# Altium PCB PCB_DO_AN_1_ver1.PcbDoc
Units mm, origin at the board's own origin, x right, y up, seen from the top; angles counter-clockwise.
Board outline 75.06 x 48.26 mm, 2 copper layers (Top Layer, Bottom Layer); 55 components, 40 nets, 213 pads, 53 vias.
Unrouted connection lines stored in the file: 1.
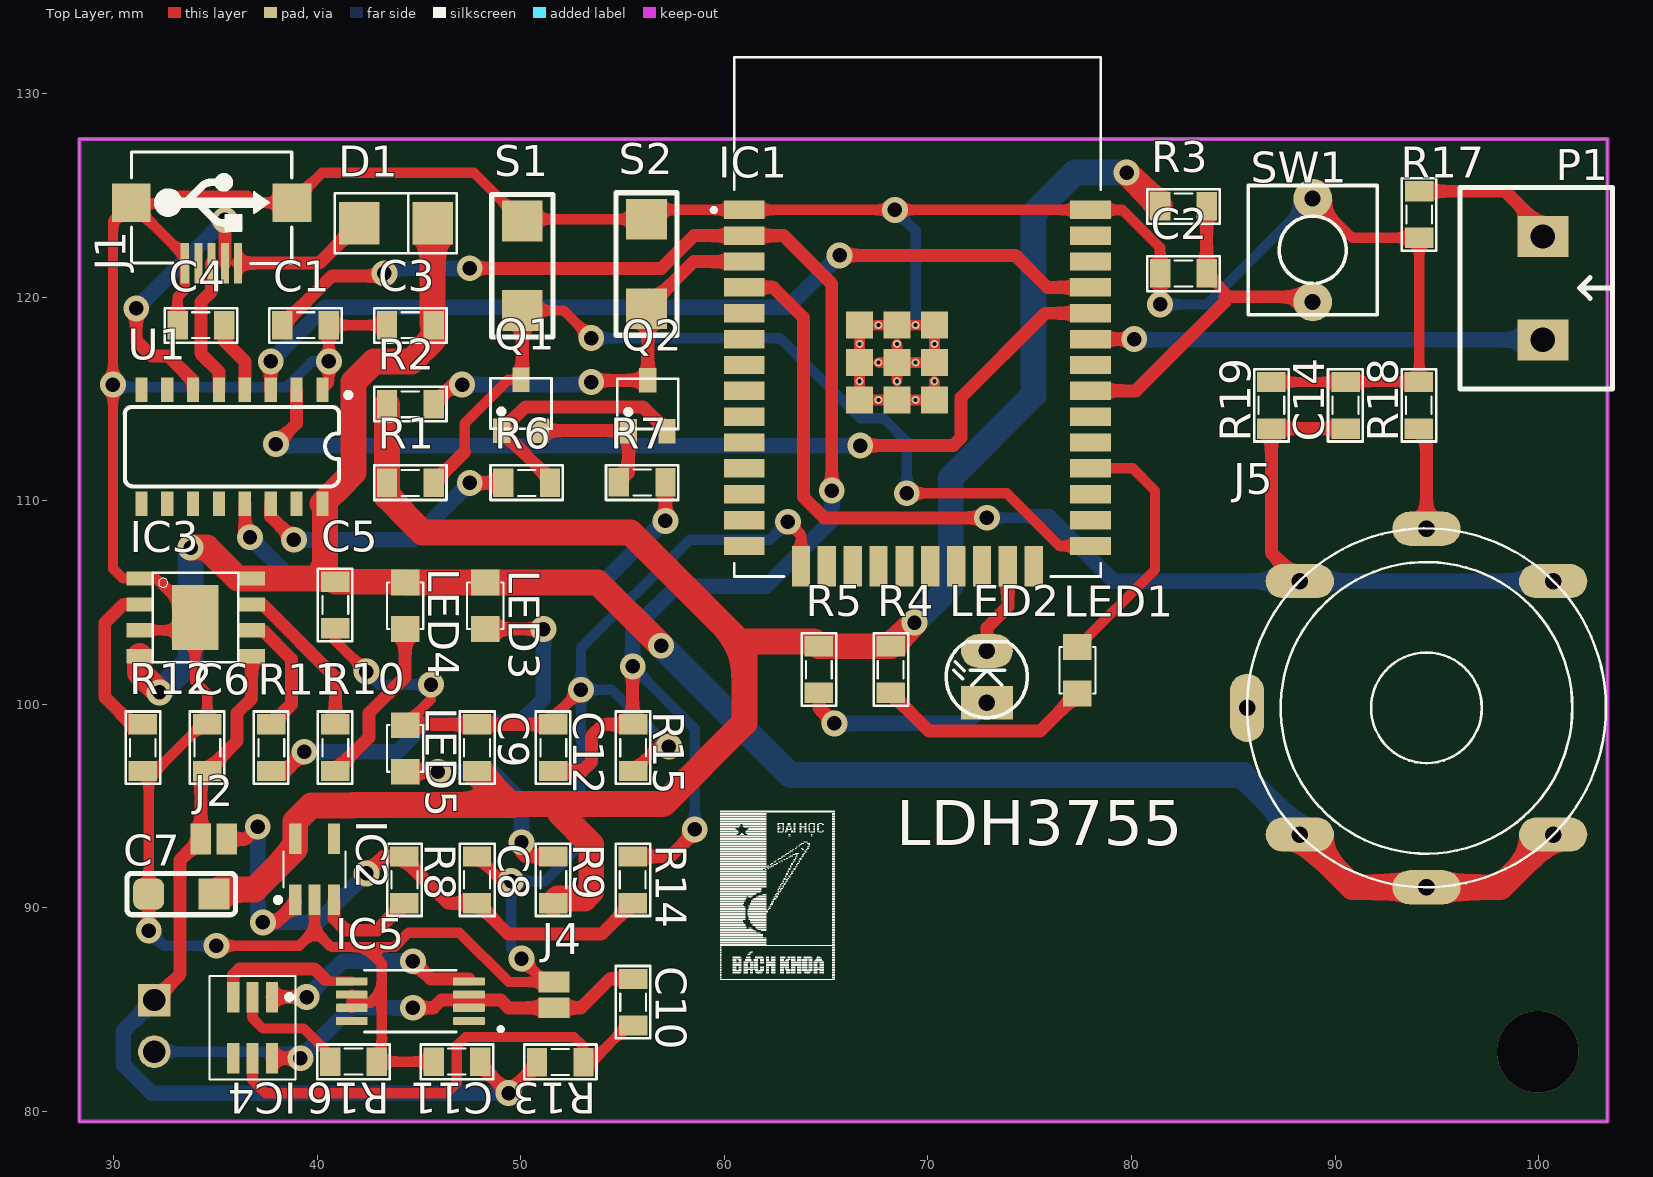
[diagram p0: Top Layer view]
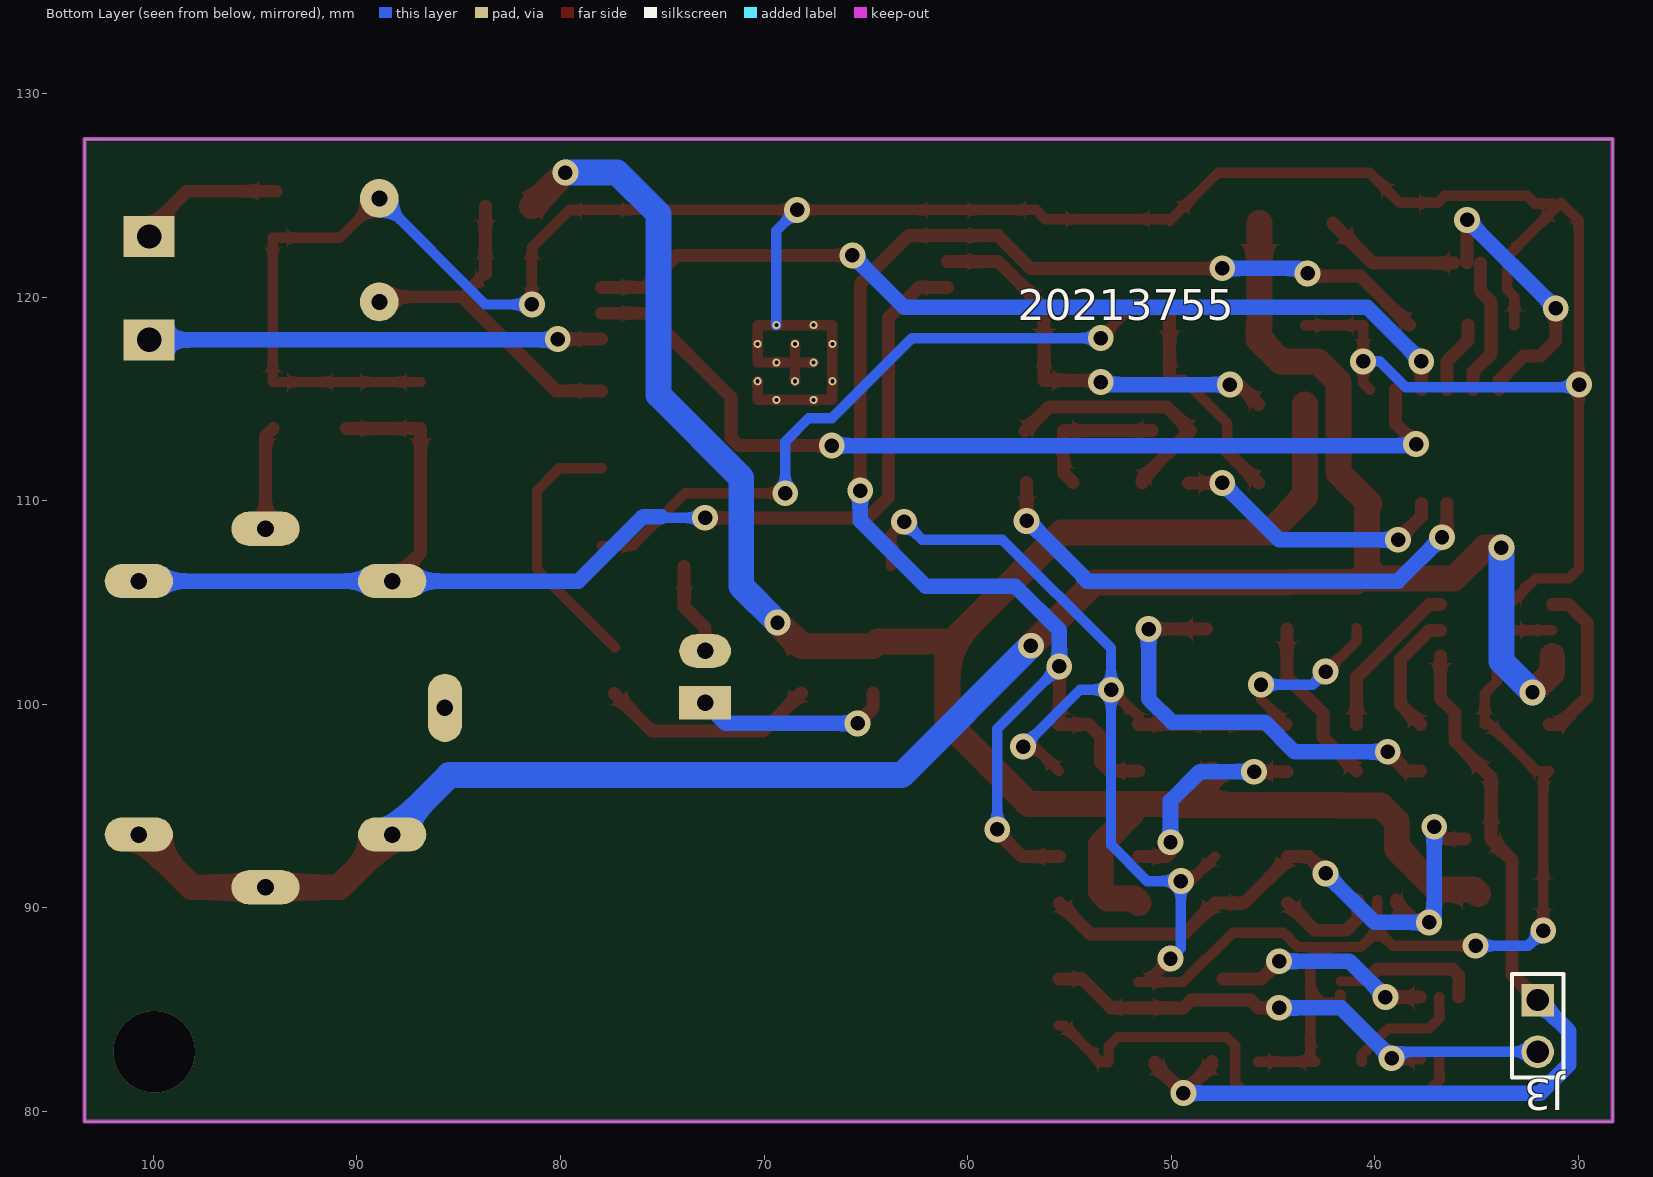
[diagram p1: Bottom Layer view, seen from below]
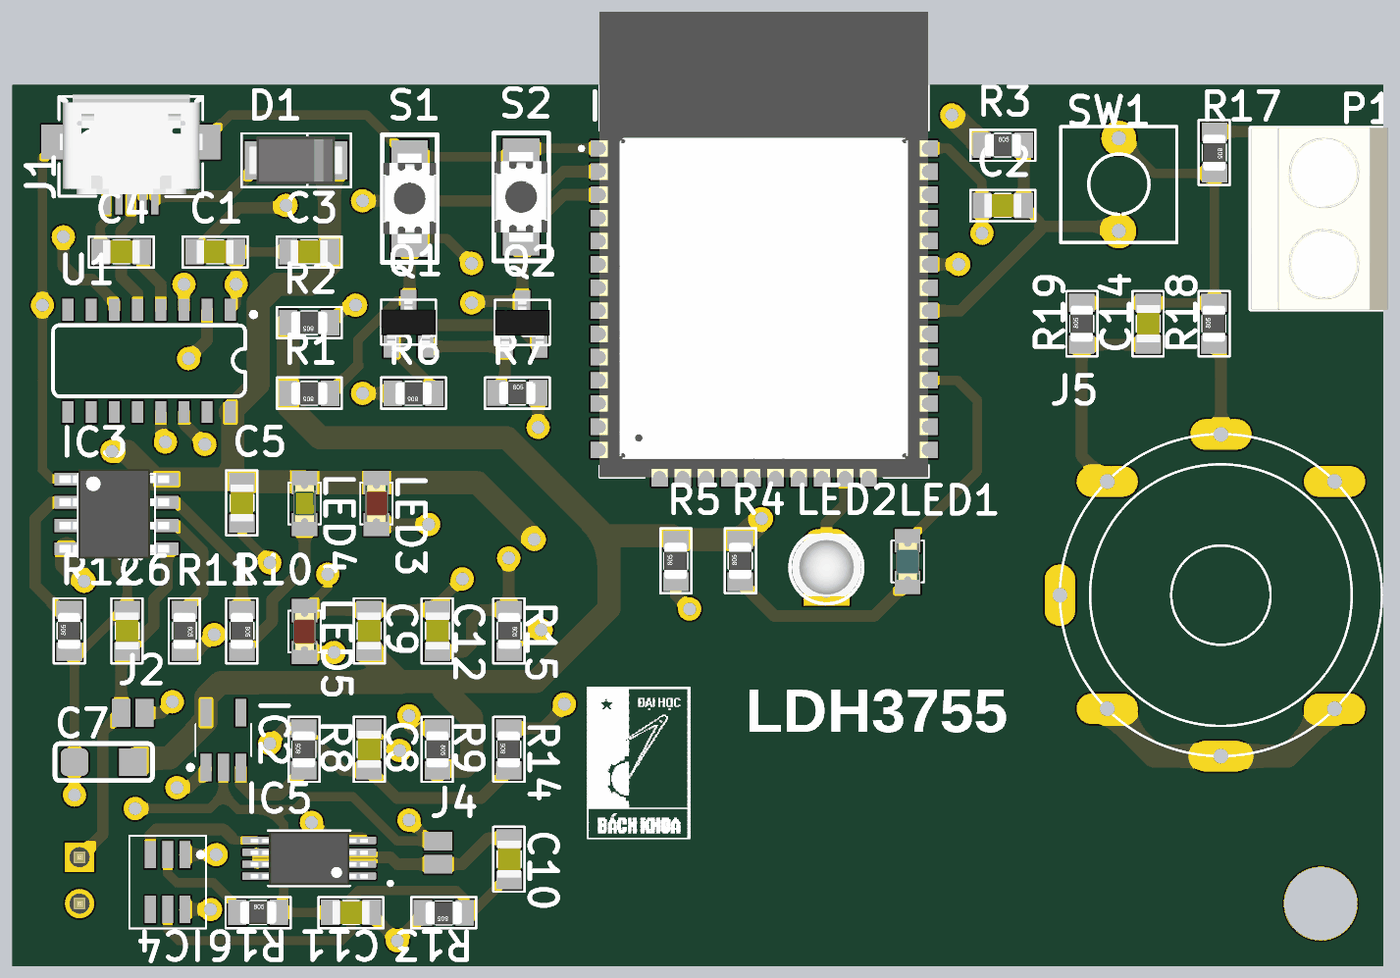
[diagram p2: 3D render of the assembled board from above, using the file's embedded part models]

## Layer stack, top to bottom
Top Solder: solder mask 0.0102, Solder Resist, Dk 3.5
Top Layer: signal copper 0.0356
Dielectric 1: dielectric 0.32, FR-4, Dk 4.8
Bottom Layer: signal copper 0.0356
Bottom Solder: solder mask 0.0102, Solder Resist, Dk 3.5

## Board outline
28.321,79.502 103.378,79.502 103.378,127.762 28.321,127.762

## Design rules (kind name [scope] priority, off if disabled: settings)
Clearance Clearance_1 [All] p1: gap=0.254 ignorepadtopadclearanceinfootprint=FALSE except(0: Arc-Hole Track-Hole SMDPad-Hole THPad-Hole Via-Hole Fill-Hole Poly-Hole Region-Hole Text-Hole)
Clearance [All] p2: gap=0.254 ignorepadtopadclearanceinfootprint=FALSE except(0: Arc-Hole Track-Hole SMDPad-Hole THPad-Hole Via-Hole Fill-Hole Poly-Hole Region-Hole Text-Hole)
PolygonConnect [All] p1: connectstyle=Relief reliefconductorwidth=0.254 reliefentries=4 polygonreliefangle="90 Angle" airgapwidth=0.254
RoutingVias [All] p1: holewidth=1.27 width=1.27 viastyle="Through Hole" minholewidth=0.254 minwidth=1.27 maxholewidth=0.762 maxwidth=1.27
SolderMaskExpansion [All] p1: expansion=0.102
Width [All] p1: maxlimit=1.27 minlimit=0.508 preferedwidth=0.762 toplayer_prefwidth=0.635 minimp=50.000000 maximp=50.000000 favimp=50.000000
30 further rules are at their usual default settings.

## Classes and differential pairs
component class U_Sensor: C14 J5 P1 R17 R18 R19
component class U_POWER: C5 C6 C7 C8 C9 C10 C11 C12 IC2 IC3 IC4 IC5 J2 J3 J4 LED3 LED4 LED5 R8 R9 R10 R11 R12 R13 R14 R15 R16
component class U_MCU: C1 C2 C3 C4 D1 IC1 J1 LED1 LED2 Q1 Q2 R1 R2 R3 R4 R5 R6 R7 S1 S2 SW1 U1

## Components (designator, comment, footprint, x,y, rotation, side; value= is the part's Value field where it differs from the comment)
C1 "104" CAP_0805 39.433,118.618 r0 top value=33p
C2 "10uF" CAP_0805 82.55,121.158 r0 top value=33p
C3 "10uF" CAP_0805 44.577,118.618 r0 top value=33p
C4 "100nF" CAP_0805 34.29,118.618 r0 top value=33p
C5 "100nF" CAP_0805 40.894,104.875 r270 top value=33p
C6 "100nF" CAP_0805 34.606,97.866 r270 top value=33p
C7 "220uF" CAP_TANTALUM_3216 33.328,90.678 r180 top
C8 "470nF" CAP_0805 47.854,91.376 r90 top value=33p
C9 "100nF" CAP_0805 47.854,97.866 r90 top value=33p
C10 "100nF" CAP_0805 55.524,85.363 r270 top value=33p
C11 "100nF" CAP_0805 46.863,82.448 r0 top value=33p
C12 "100nF" CAP_0805 51.6,97.866 r270 top value=33p
C14 "104" CAP_0805 90.513,114.681 r270 top value=33p
D1 "Diode SMD" DIO-214AC(SMA) 43.942,123.579 r180 top value=1N5007
IC1 "ESP32-WROOM-32" MODULE_ESP32-WROOM-32 69.481,119.023 r0 top
IC2 "RT9013" SOT23-5 39.878,91.887 r90 top
IC3 "TP4056" TP4056 34.036,104.267 r0 top
IC4 "DW01A" SOT23-6 36.83,84.112 r270 top
IC5 "FS8205A" FS8205A 44.577,85.471 r180 top
J1 "USB-5" USB-M1 34.817,121.666 r0 top
J2 "Jumper2" JUMPER2 35.56,93.375 r0 top
J3 "VBAT_IN" JP2-D1T 32.004,85.471 r270 bottom
J4 "Jumper2" JUMPER2 51.638,86.36 r90 top
J5 "Gas Sensor Socket" MQ2 94.488,99.822 r180 top
LED1 "LED" LED-0805-Blue 77.343,100.52 r90 top value="LED 3 ly Single Colour"
LED2 "LED" LED-3 72.898,100.076 r90 top value="LED 3 ly Single Colour"
LED3 "LED" LED-0805-Red 48.26,105.98 r270 top value="LED 3 ly Single Colour"
LED4 "LED" LED-0805-Green 44.323,105.98 r270 top value="LED 3 ly Single Colour"
LED5 "" LED-0805-Red 44.323,96.685 r90 top value="LED 3 ly Single Colour"
P1 "Header 2 - M" "Medium - Header 2" 100.203,120.434 r270 top
Q1 "2SC1815" SOT23D 50.013,114.681 r0 top value=C1815
Q2 "2SC1815" SOT23D 56.246,114.661 r0 top value=C1815
R1 "10k" RES-SMD-0805 44.577,110.871 r180 top
R2 "10k" RES-SMD-0805 44.577,114.732 r180 top
R3 "10k" RES-SMD-0805 82.55,124.46 r0 top
R4 "Resistor - SMD" RES-SMD-0805 68.172,101.702 r90 top
R5 "Resistor - SMD" RES-SMD-0805 64.643,101.702 r90 top
R6 "10k" RES-SMD-0805 50.292,110.871 r180 top
R7 "10k" RES-SMD-0805 55.966,110.896 r0 top
R8 "10k" RES-SMD-0805 44.285,91.376 r90 top
R9 "1k" RES-SMD-0805 51.6,91.376 r270 top
R10 "1k" RES-SMD-0805 40.894,97.866 r270 top
R11 "1k" RES-SMD-0805 37.75,97.866 r270 top
R12 "1k2" RES-SMD-0805 31.436,97.866 r90 top
R13 "0.1k" RES-SMD-0805 51.943,82.423 r180 top
R14 "30k" RES-SMD-0805 55.499,91.376 r90 top
R15 "100k" RES-SMD-0805 55.524,97.866 r270 top
R16 "1k" RES-SMD-0805 41.783,82.448 r0 top
R17 "Resistor - SMD" RES-SMD-0805 94.132,124.054 r270 top
R18 "Resistor - SMD" RES-SMD-0805 94.107,114.681 r90 top
R19 "Resistor - SMD" RES-SMD-0805 86.868,114.681 r90 top
S1 "SW-SMD" "SW 3x2x4" 50.077,121.539 r90 top
S2 "SW-SMD" "SW 3x2x4" 56.181,121.625 r90 top
SW1 "SW" SW2 88.9,124.841 r270 top value="SW chip 2 pin"
U1 "CH340C" SOP-16 35.814,112.649 r180 top

## Footprints (in the part's own frame and the unit in brackets; to place one, negate y for a bottom-side part, rotate by r counter-clockwise, add the part's x,y. Pads: shape width x height; smd on the part's side, far side on the other; paste and mask are expansions set on the pad)
CAP_0805 [mil]
  rect 39.37x55 smd: 1(-45,0) 2(45,0)
  silkscreen extent -70,-34 70,33, body extent -40,-25 40,25, height 24
CAP_TANTALUM_3216 [mil]
  rect 60x60 smd: 1(-62.99,0)
  rrect50% 60x60 smd: 2(62.99,0)
  silkscreen extent -105,-40 105,40, body extent -67,-35 67,35, height 67
DIO-214AC(SMA) [mm] "DO-214AC Diode Smallest Size"
  rect 2x2.1 smd: 1(1.88,-0.051) 2(-1.732,-0.051)
  silkscreen extent -2.92,-1.52 3.07,1.42, body extent -2.5,-1.35 2.7,1.25, height 2.4
FS8205A [mm]
  rrect25% 1.56x0.4 smd: 1(-2.88,1.031) 2(-2.88,0.381) 3(-2.88,-0.269) 4(-2.88,-0.919) 5(2.88,-0.919) 6(2.88,-0.269) 7(2.88,0.381) 8(2.88,1.031)
  silkscreen extent -4.54,-1.46 2.25,1.57, body extent -3.2,-1.4 3.2,1.53, height 1.2
JP2-D1T [mm] "2 pins, 1 row, straight, gold plating"
  rect 1.6x1.6 hole 1.1: 1(0,0)
  round 1.6 hole 1.1: 2(2.54,0)
  silkscreen extent -1.27,-1.27 3.81,1.27, body extent -1.27,-1.27 3.81,1.27, height 8.54
JUMPER2 [mil]
  rect 40x60 smd: 1(-50,0) 2(0,0)
LED-3 [mil] "LED 2 PIN, 3ly Only colour"
  rect 65x100 hole 32: 1(0,0)
  oval 65x100 hole 32: 2(100,0)
  silkscreen extent -29,-78 118,79, body extent -13,-75 125,75, height 217
LED-0805-Blue [mil]
  rect 50x55 smd: 1(0,0) 2(90,0)
  silkscreen extent 0,-35 90,35, body extent 5,-25 85,25, height 43
LED-0805-Green [mil]
  rect 50x55 smd: 1(0,0) 2(90,0)
  silkscreen extent 0,-35 90,35, body extent 5,-25 85,25, height 43
LED-0805-Red [mil]
  rect 50x55 smd: 1(0,0) 2(90,0)
  silkscreen extent 0,-35 90,35, body extent 5,-25 85,25, height 43
"Medium - Header 2" [mm]
  rect 2x2.5 hole 1.2: 1(-2.54,0) 2(2.54,0)
  silkscreen extent -4.95,-4.08 4.95,3.43, body extent -5,-4.07 5,3.43, height 10
MODULE_ESP32-WROOM-32 [mm]
  rect 2x0.9 smd: 1(-8.5,5.26) 2(-8.5,3.99) 3(-8.5,2.72) 4(-8.5,1.45) 5(-8.5,0.18) 6(-8.5,-1.09) 7(-8.5,-2.36) 8(-8.5,-3.63) 9(-8.5,-4.9) 10(-8.5,-6.17) 11(-8.5,-7.44) 12(-8.5,-8.71) 13(-8.5,-9.98) 14(-8.5,-11.25) 25(8.5,-11.25) 26(8.5,-9.98) 27(8.5,-8.71) 28(8.5,-7.44) 29(8.5,-6.17) 30(8.5,-4.9) 31(8.5,-3.63) 32(8.5,-2.36) 33(8.5,-1.09) 34(8.5,0.18) 35(8.5,1.45) 36(8.5,2.72) 37(8.5,3.99) 38(8.5,5.26)
  rect 0.9x2 smd: 15(-5.715,-12.25) 16(-4.445,-12.25) 17(-3.175,-12.25) 18(-1.905,-12.25) 19(-0.635,-12.25) 20(0.635,-12.25) 21(1.905,-12.25) 22(3.175,-12.25) 23(4.445,-12.25) 24(5.715,-12.25)
  rect 1.33x1.33 smd: 39_1(-2.835,-0.405) 39_2(-1,-0.405) 39_3(0.835,-0.405) 39_4(-2.835,-2.24) 39_5(-1,-2.24) 39_6(0.835,-2.24) 39_7(-2.835,-4.075) 39_8(-1,-4.075) 39_9(0.835,-4.075)
  round 0.4 hole 0.2: 39_10(-1.917,-0.405) 39_11(-0.082,-0.405) 39_12(-2.835,-1.322) 39_13(-1,-1.322) 39_14(0.835,-1.322) 39_15(-1.917,-2.24) 39_16(-0.082,-2.24) 39_17(-2.835,-3.157) 39_18(-1,-3.157) 39_19(0.835,-3.157) 39_20(-1.917,-4.075) 39_21(-0.082,-4.075)
  silkscreen extent -10.1,-12.75 9,12.75, body extent -9.02,-12.75 8.98,12.75, height 3.2
MQ2 [mil] "6P-D17.6X9.8H"
  oval 132x66 hole 32: 1(-244.98,245) 2(0,347) 3(245,245) 4(245,-244.98) 5(0,-346.46) 6(-244.98,-244.98)
  oval 66x132 hole 32: 7(347,0)
  silkscreen extent -347,-347 347,347
RES-SMD-0805 [mil]
  rect 39.37x55 smd: 1(-45,0) 2(45,0)
  silkscreen extent -70,-34 70,33, body extent -39,-25 39,25, height 31
SOP-16 [mm]
  rect 0.6x1.2 smd: 1(-4.445,-2.8) 2(-3.175,-2.8) 3(-1.905,-2.8) 4(-0.635,-2.8) 5(0.635,-2.8) 6(1.905,-2.8) 7(3.175,-2.8) 8(4.445,-2.8) 9(4.445,2.8) 10(3.175,2.8) 11(1.905,2.8) 12(0.635,2.8) 13(-0.635,2.8) 14(-1.905,2.8) 15(-3.175,2.8) 16(-4.445,2.8)
  silkscreen extent -5.84,-2.67 5.26,1.95, body extent -4.95,-3.47 4.95,3.47, height 1.75
SOT23-5 [mm] "SOT23, 5-Leads, Body 3.0x3.0mm (max), Pitch 0.95mm, IPC Medium Density"
  rect 1.5x0.6 smd: 1(-1.5,0.95) 2(-1.5,0) 3(-1.5,-0.95) 4(1.5,-0.95) 5(1.5,0.95)
  silkscreen extent -1.62,-1.52 0.87,1.92, body extent -1.75,-1.52 1.75,1.53, height 1.45
SOT23-6 [mm] "SOT23, 5-Leads, Body 3.0x3.0mm (max), Pitch 0.95mm, IPC Medium Density"
  rect 1.5x0.6 smd: 1(-1.5,0.95) 2(-1.5,0) 3(-1.5,-0.95) 4(1.5,-0.95) 5(1.5,0) 6(1.5,0.95)
  silkscreen extent -2.54,-2.11 2.54,2.11, body extent -1.75,-1.52 1.75,1.53, height 1.45
SOT23D [mm] "SOT 23C - 1-3-2 - BCE"
  rect 0.85x1.2 smd: 1(-0.95,-1.25) 2(0.94,-1.245) 3(0,1.25)
  silkscreen extent -1.5,-1.14 1.5,1.32, body extent -1.5,-1.17 1.5,1.33, height 1.06
SW2 [mil] "SW button 2pin, 250x 250 mil"
  round 75 hole 31: 1(0,0) 2(200,0)
  silkscreen extent -25,-125 225,125
"SW 3x2x4" [mm]
  rect 2x2 smd: 1(-2.2,0) 2(2.2,0)
  silkscreen extent -3.5,-1.5 3.5,1.5, body extent -2.45,-1.45 2.45,1.45, height 2
TP4056 [mm]
  rect 1.3x0.7 smd: 1(-2.75,1.905) 2(-2.75,0.635) 3(-2.75,-0.635) 4(-2.75,-1.905) 5(2.75,-1.905) 6(2.75,-0.635) 7(2.75,0.635) 8(2.75,1.905)
  rect 2.3x3.2 smd: 3(-0.025,0)
  silkscreen extent -2.1,-2.2 2.1,2.2, body extent -3.13,-2.45 2.87,2.45, height 1.75
USB-M1 [mm]
  rect 0.4x2 smd: 1(1.3,0) 2(0.65,0) 3(0,0) 4(-0.65,0) 5(-1.321,0)
  rect 1.9x1.9 smd: 5(-3.95,2.968) 5(3.95,2.968)
  silkscreen extent -3.94,-0.03 3.94,5.46, body extent -3.98,0.11 4,5.54, height 2.71

## Part data
C1 C2 C3 C4 C5 C6 C8 C9 C10 C11 C12 C14: library part CapSMD, "Capacitor", LatestRevisionDate=17-Jul-2002, LatestRevisionNote="Re-released for DXP Platform.", PackageReference=RAD-0.3, Published=8-Jun-2000, Publisher="Altium Limited"
C7: library part "Cap Pol", "Polarized Capacitor (Axial)", LatestRevisionDate=17-Jul-2002, LatestRevisionNote="Re-released for DXP Platform.", PackageReference=POLAR0.8, Published=8-Jun-2000, Publisher="Altium Limited"
D1: "Default Diode", Code - JEDEC=DO-214-AB, Published=8-Jun-2000, Publisher="Altium Limited", Revision="July-2002: Re-released for DXP Platform."
IC1: "Bluetooth, WiFi Transceiver Module 2.4GHz ~ 2.5GHz Surface Mount", Package="Module Espressif Systems", Digi-Key_Part_Number=1904-1010-1-ND, Digi-Key_Purchase_URL=https://www.digikey.com/product-detail/en/espressif-systems/ESP32-WROOM-32/1904-1010-1-ND/8544305?utm_source=snapeda&utm_medium=aggregator&utm_campaign=symbol, MF="Espressif Systems", MP=ESP32-WROOM-32, SnapEDA_Link=https://www.snapeda.com/parts/ESP32-WROOM-32/Espressif%20Systems/view-part/2753322/?ref=snap
IC2: "https://linhkien.cxt.vn/5435-rt9013-33gb-ic-reg-linear-33v-500ma-sot23-5.html"
IC3: "Complete single cell Li-Ion battery with a constant current / constant voltage linear charger"
IC4: "One Cell Lithium-ion/Polymer Battery Protection IC"
J1: Manufacturer=FCI, Manufacturer Part Number=10118193-0001LF, Supplier Part Number 1=609-4616-1-ND, .Checked PCB=RF, .Checked SCH=MM, .Creator=MM, Category="Connectors, Interconnects", ComponentLink1Description=http://portal.fciconnect.com/Comergent//fci/drawing/10118193.pdf, ComponentLink1URL=http://portal.fciconnect.com/Comergent//fci/drawing/10118193.pdf, Connector Type="USB - micro B", Features="Shielded, Solder Retention", Gender=Receptacle, Ingress Protection=-, Mounting Type="Surface Mount, Right Angle, Horizontal", Number of Contacts=5, Packaging="Cut Tape (CT)", Pricing 1="1=0.46, 10=0.433, 25=0.3712, 50=0.3156, 100=0.3032, 250=0.27224, 500=0.25988 (USD)", RoHS="RoHS Compliant", Specifications="USB 2.0", Stock 1=28642, Supplier 1=Digi-Key
J2 J4: "Jumper, 2-Pin"
J3: library part JP2, "WR-PHD 2.54 mm Angled Socket Header", Manufacturer="Würth Elektronik eiSos GmbH", partNo=613002143121, ComponentLink1 Description=Manufacturer, ComponentLink1URL=http://www.we-online.com, ComponentLink2 Description=Datasheet, ComponentLink2URL=http://katalog.we-online.de/em/datasheet/6130xx143121.pdf, Created by="Karrer Zheng", Created Date="29 March 2013", NoPins=02
J5: library part MQ2
LED1 LED2 LED3 LED4: "LED Single colour Green and Red"
LED5: library part LED, "LED Single colour Green and Red"
P1: "Header, 2-Pin, Medium", LatestRevisionDate=17-Jul-2002, LatestRevisionNote="Re-released for DXP Platform.", Publisher="Altium Limited"
Q1 Q2: library part C1815, "NPN 600mW, ECB", =C2383
R1 R2 R3 R6 R7 R9 R13 R16: library part "Resistor - SMD", "Resistor SMD", Manufacturer="Generic Components", Class=Passive, Published=08/06/2000, Publisher="Altium Hobart Technology Centre"
R4 R5 R17 R18 R19: "Resistor SMD", Manufacturer="Generic Components", Class=Passive, Published=08/06/2000, Publisher="Altium Hobart Technology Centre"
R8 R10 R11 R12 R14 R15: library part "Resistor - SMD", "Resistor", Manufacturer="Generic Components", Class=Passive, Published=08/06/2000, Publisher="Altium Hobart Technology Centre"
S1 S2: "Switch", LatestRevisionDate=17-Jul-2002, LatestRevisionNote="Re-released for DXP Platform.", PackageReference=SPST-2, Published=24-Mar-1999, Publisher="Altium Limited"
SW1: library part SW2, "Switch button 2 pin"
U1: "USB to serial chip CH340", Package=Package, Availability=Unavailable, Check_prices=https://www.snapeda.com/parts/CH340C/WCH/view-part/5428851/?ref=eda, MF=WCH, MP=CH340C, Price=None, SnapEDA_Link=https://www.snapeda.com/parts/CH340C/WCH/view-part/5428851/?ref=snap

## Via types
v1: diameter 1.27, hole 0.711, Top Layer to Bottom Layer, 52 vias
v2: diameter 4, hole 4, Top Layer to Bottom Layer, 1 vias

## Nets (pads, with @x,y where several pads share a name; then routed paths per layer and width w, separated by ;. In a path a pad name is that pad's centre, name@x,y a point inside that pad or via, vN(x,y) a via of type N, cw(c..) or ccw(c..) an arc to the next point about the centre after c; other vN are vias at no path point)
3V3: C7.1 C9.1 IC2.5 R1.2 R2.2 R3.1 R4.2 R5.2 R9.2 | length 107.8
  Top Layer w1.27: C7.1 35.157,90.906 36.931,90.906 38.928,92.903 IC2.5 38.928,94.239 39.715,95.026 41.753,95.026 41.775,95.047 49.53,95.047 ; R2.2 R1.2 43.434,110.18 45.182,108.432 55.398,108.432 60.985,102.845 ; C9.1@48.031,96.545 49.53,95.047 ; R9.2 51.829,90.462 53.124,90.462 53.467,90.805 53.467,93.108 51.943,94.632 51.943,95.097 ; v1(69.341,104.013) R4.2 R5.2 64.415,103.073 60.985,103.073 60.985,102.845 ; v1(79.756,126.111) R3.1 ; 49.53,95.047 49.631,95.047 49.682,95.097 51.943,95.097 ; 51.943,95.097 56.997,95.097 60.985,99.085 60.985,102.845
  Bottom Layer w1.27: v1(69.341,104.013) 71.12,105.792 71.12,111.125 75.184,115.189 75.184,124.079 77.216,126.111 v1(79.756,126.111)
5V: C3.2 C5.1 D1.2 IC3.4 IC3.8 J5.1 J5.2 J5.3 LED3.1 LED4.1 U1.16 | length 105.4
  Top Layer w1.27: IC3.4 31.286,101.556 v1(32.258,100.584) ; v1(33.782,107.696) 34.589,107.696 36.113,106.172 IC3.8 40.741,106.172 C5.1 44.285,106.019 LED4.1 LED3.1 53.786,105.98 v1(56.896,102.87) ; 40.259,106.654 40.386,106.781 40.386,109.722 U1.16 41.783,111.373 41.783,115.824 42.799,116.84 44.632,116.84 45.72,117.927 C3.2 45.674,118.664 D1.2 ; J5.3 90.856,91.008 J5.2 98.12,91.008 J5.1
  Bottom Layer w1.27: v1(32.258,100.584) 33.782,102.108 v1(33.782,107.696) ; v1(56.896,102.87) 63.246,96.52 85.471,96.52 J5.3@88.392,93.599
GND: C1.2 C2.1 C3.1 C4.1 C5.2 C6.1 C7.2 C8.2 C9.2 C11.1 C12.1 C14.1 IC1.1 IC1.15 IC1.38 IC1.39_1 IC1.39_2 IC1.39_3 IC1.39_4 IC1.39_5 IC1.39_6 IC1.39_7 IC1.39_8 IC1.39_9 IC1.39_10 IC1.39_11 IC1.39_12 IC1.39_13 IC1.39_14 IC1.39_15 IC1.39_16 IC1.39_17 IC1.39_18 IC1.39_19 IC1.39_20 IC1.39_21 IC2.2 IC3.1 IC3.3 IC5.6 IC5.7 J1.5 J4.2 LED5.2 R12.1 R15.2 R16.2 R17.2 R18.2 R19.2 S1.2 S2.2 SW1.1 U1.1 | length 276.5
  Top Layer w0.508: J1.5@31.242,124.587 32.131,124.587 32.512,124.968 36.576,124.968 36.91,124.634 38.767,124.634 40.245,126.111 47.706,126.111 S1.2 50.163,123.825 S2.2 56.639,124.283 IC1.1 v1(68.376,124.283) IC1.38 79.552,124.283 81.407,122.428 C2.1 v1(81.407,119.634) ; IC3.3@31.286,103.632 33.376,103.632 IC3.3@34.011,104.267 ; v1(31.728,88.878) C7.2 31.728,96.431 R12.1 32.08,96.723 34.366,99.009 C6.1 34.606,100.522 34.011,101.117 IC3.3@34.011,104.267 ; C4.1 33.147,120.015 33.497,120.365 J1.5@33.497,121.666 ; J1.5@33.459,121.666 33.459,122.042 30.867,124.634 29.972,123.738 v1(29.972,115.697) 29.972,106.68 30.48,106.172 IC3.1 32.106,106.172 IC3.3@34.011,104.267 ; v1(35.052,88.138) 39.116,88.138 39.878,88.9 ; IC2.2 39.878,88.9 ; U1.1 40.576,115.766 v1(40.576,116.84) C1.2 C3.1 ; C5.2 40.894,103.124 v1(42.418,101.6) ; IC5.7 41.697,85.344 ; IC5.6 41.697,85.344 ; LED5.2 44.361,99.009 45.593,100.241 v1(45.593,100.965) ; C11.1 R16.2 43.18,82.702 43.18,85.913 ; C8.2 49.06,91.313 v1(49.53,91.313) ; v1(50.038,87.503) J4.2@51.181,86.36 ; C12.1 51.6,99.352 v1(52.959,100.711) ; J4.2 J4.2@51.181,86.36 ; R15.2 56.718,97.917 v1(57.277,97.917) ; v1(63.119,108.966) 63.766,108.319 IC1.15 ; IC1.39_15 IC1.39_5 ; IC1.39_18 IC1.39_5 ; IC1.39_13 IC1.39_5 ; IC1.39_19 IC1.39_9 IC1.39_21 IC1.39_8 IC1.39_20 IC1.39_7 IC1.39_17 IC1.39_4 IC1.39_12 IC1.39_1 IC1.39_10 IC1.39_2 IC1.39_11 IC1.39_3 IC1.39_14 IC1.39_6 IC1.39_16 IC1.39_5 ; R19.2 R18.2 94.132,115.849 R17.2 90.83,122.911 SW1.1 ; 39.878,88.9 40.703,88.075 42.355,88.075 ; 41.697,85.344 42.611,85.344 43.18,85.913 ; 42.355,88.075 43.786,88.075 44.485,88.773 46.99,88.773 49.403,86.36 J4.2@51.181,86.36 ; 42.355,88.075 43.18,87.249 43.18,85.913
  Top Layer w0.635: LED5.2@44.361,99.009 C9.2 C12.1
  Bottom Layer w0.508: v1(29.972,115.697) 30.099,115.57 38.481,115.57 39.751,116.84 v1(40.576,116.84) ; v1(31.728,88.878) 32.469,88.138 v1(35.052,88.138) ; v1(42.418,101.6) 43.053,100.965 v1(45.593,100.965) ; v1(50.038,87.503) 49.53,88.011 v1(49.53,91.313) 51.181,91.313 52.959,93.091 v1(52.959,100.711) ; v1(57.277,97.917) 54.483,100.711 v1(52.959,100.711) ; v1(63.119,108.966) 62.23,108.077 58.293,108.077 52.959,102.743 v1(52.959,100.711) ; v1(68.376,124.283) 69.399,123.26 IC1.39_11 ; v1(81.407,119.634) 83.693,119.634 SW1.1
GPIO0: IC1.25 Q1.3 R1.1 S1.1 | length 44.8
  Top Layer w0.508: 47.244,112.395 47.244,113.792 49.383,115.931 Q1.3 ; S1.1 52.111,119.339 v1(53.467,117.983) ; v1(68.961,110.363) 73.864,110.363 76.454,107.773 IC1.25
  Top Layer w0.635: R1.1 47.244,112.395 ; Q1.3 50.077,115.996 S1.1
  Bottom Layer w0.508: v1(53.467,117.983) 62.738,117.983 66.675,114.046 67.818,114.046 68.961,112.903 v1(68.961,110.363)
GPIO14: IC1.23 LED2.2 | length 4.6
  Top Layer w0.635: LED2.2 72.898,103.759 73.926,104.787 IC1.23
GPIO17: IC1.28 LED1.2 | length 12.9
  Top Layer w0.508: LED1.2 81.153,106.617 81.153,110.49 80.06,111.583 IC1.28
GPIO19: C2.2 IC1.31 R3.2 SW1.2 | length 17.6
  Top Layer w0.508: C2.2 84.582,120.269 84.582,120.015
  Top Layer w0.635: IC1.31 80.214,115.393 84.582,119.761 ; C2.2 R3.2 ; 84.582,120.015 88.646,120.015 SW1.2
NetC1_1: C1.1 C12.2 IC1.2 R14.2 R15.1 | length 76.7
  Top Layer w0.635: C1.1 38.308,118.618 40.721,121.031 43.18,121.031 v1(43.307,121.158) ; v1(47.498,121.412) 56.911,121.412 58.512,123.013 IC1.2 62.915,123.013 65.278,120.65 v1(65.278,110.49) ; C12.2 53.035,96.723 53.467,97.155 53.467,98.425 54.051,99.009 R15.1 55.626,99.111 55.499,99.238 v1(55.499,101.854) ; R14.2 57.34,92.519 58.547,93.726 v1(58.547,93.853)
  Bottom Layer w0.508: v1(55.499,101.854) 58.547,98.806 v1(58.547,93.853)
  Bottom Layer w0.762: v1(43.307,121.158) 43.434,121.158 43.688,121.412 v1(47.498,121.412) ; v1(55.499,101.854) 55.499,103.632 57.658,105.791 62.052,105.791 65.278,109.017 v1(65.278,110.49)
NetC4_2: C4.2 U1.4 | length 3.6
  Top Layer w0.635: C4.2 35.433,117.856 36.449,116.84 U1.4
NetC10_1: C10.1 IC4.6 IC5.2 IC5.3 J3.2 J4.1 | length 27
  Top Layer w0.635: IC4.6 v1(39.178,82.612) ; v1(44.704,85.09) 45.72,85.09 46.101,85.471 49.022,85.471 49.403,85.09 J4.1 52.959,85.09 54.376,86.507 C10.1
  Bottom Layer w0.508: J3.2 38.859,82.931 v1(39.178,82.612)
  Bottom Layer w0.762: v1(39.178,82.612) 41.656,85.09 v1(44.704,85.09)
NetC10_2: C10.2 IC4.5 R13.1 | length 23.9
  Top Layer w0.508: IC4.5 36.83,81.534 37.465,80.899 46.355,80.899 46.863,81.407 46.863,83.222 47.296,83.655 52.616,83.655 53.086,83.185 R13.1 53.467,82.423 55.265,84.221 C10.2
NetC14_2: C14.2 IC1.4 J5.4 J5.6 R19.1 | length 62.6
  Top Layer w0.635: IC1.4 62.407,120.473 63.881,118.999 63.881,110.181 64.905,109.156 v1(72.898,109.156) ; J5.4 86.868,107.442 R19.1 C14.2
  Bottom Layer w0.508: v1(72.898,109.156) 74.993,109.156 75.057,109.22
  Bottom Layer w0.762: 75.057,109.22 75.946,109.22 79.121,106.045 J5.4 J5.6
NetD1_1: D1.1 J1.1 | length 6.8
  Top Layer w0.635: J1.1 40.099,121.666 D1.1
NetIC1_33: IC1.33 P1.2 | length 22.2
  Top Layer w0.635: IC1.33 v1(80.137,117.932)
  Bottom Layer w0.762: v1(80.137,117.932) 80.175,117.894 P1.2
NetIC2_3: IC2.3 R8.1 | length 5.2
  Top Layer w0.635: IC2.3 40.828,89.474 41.402,88.9 42.951,88.9 R8.1
NetIC3_2: IC3.2 R12.2 | length 8.2
  Top Layer w0.508: 29.568,100.353 29.591,100.33
  Top Layer w0.635: 29.568,100.353 29.568,103.99 30.48,104.902 IC3.2 ; 29.591,100.33 30.912,99.009 R12.2
NetIC3_6: IC3.6 R11.1 | length 6.2
  Top Layer w0.635: IC3.6 37.324,103.632 38.735,102.221 38.735,99.994 R11.1
NetIC3_7: IC3.7 R10.1 | length 7.9
  Top Layer w0.635: IC3.7 37.324,104.902 40.894,101.332 R10.1
NetIC4_1: IC4.1 IC5.4 | length 10.8
  Top Layer w0.635: IC4.1 v1(39.483,85.612) ; v1(44.704,87.376) 45.568,86.512 IC5.4@47.457,86.512
  Bottom Layer w0.762: v1(39.483,85.612) 41.247,87.376 v1(44.704,87.376)
NetIC4_2: IC4.2 R16.1 | length 5.9
  Top Layer w0.508: IC4.2 36.83,84.582 37.338,84.074 39.333,84.074 40.64,82.767 R16.1
NetIC4_3: IC4.3 IC5.5 | length 7.3
  Top Layer w0.254: 40.361,86.512 40.483,86.39
  Top Layer w0.457: 40.483,86.39 IC5.5
  Top Layer w0.635: IC4.3 35.88,86.68 36.195,86.995 39.878,86.995 40.361,86.512
NetIC5_1: IC5.1 IC5.8
NetJ1_2: J1.2 U1.6 | length 13.9
  Top Layer w0.635: v1(31.115,119.438) 31.115,117.856 31.877,117.094 32.702,117.094 33.909,115.887 U1.6 ; J1.2 v1(35.467,123.791)
  Bottom Layer w0.762: v1(31.115,119.438) v1(35.467,123.791)
NetJ1_3: J1.3 U1.5 | length 6.8
  Top Layer w0.635: J1.3 34.817,120.288 34.29,119.761 34.29,117.221 35.179,116.332 U1.5
NetJ5_5: J5.5 R18.1 | length 5.1
  Top Layer w0.635: R18.1 94.488,113.157 J5.5
NetLED1_1: LED1.1 R4.1 | length 10.7
  Top Layer w0.635: R4.1 70.052,98.679 75.501,98.679 LED1.1
NetLED2_1: LED2.1 R5.1 | length 9.7
  Top Layer w0.635: R5.1 64.643,99.822 v1(65.405,99.06)
  Bottom Layer w0.762: v1(65.405,99.06) 71.882,99.06 LED2.1
NetLED3_2: LED3.2 R11.2 | length 21.1
  Top Layer w0.635: R11.2 38.43,96.723 v1(39.37,97.663) ; LED3.2 v1(51.116,103.694)
  Bottom Layer w0.762: v1(39.37,97.663) 43.942,97.663 45.401,99.122 49.973,99.122 51.116,100.265 v1(51.116,103.694)
NetLED4_2: LED4.2 R10.2 | length 8.4
  Top Layer w0.635: R10.2 42.545,98.374 42.545,99.568 44.323,101.346 LED4.2
NetLED5_1: LED5.1 R9.1 | length 10.5
  Top Layer w0.635: LED5.1 v1(45.936,96.685) ; v1(50.038,93.218) 50.038,92.71 50.228,92.52 R9.1
  Bottom Layer w0.762: v1(45.936,96.685) 48.603,96.685 50.038,95.25 v1(50.038,93.218)
NetP1_1: P1.1 R17.1 | length 7
  Top Layer w0.635: R17.1@93.98,125.197 98.361,125.197 P1.1@100.203,123.355
NetQ1_1: Q1.1 Q2.2 R6.1 | length 12.6
  Top Layer w0.635: R6.1 51.435,111.059 Q1.1 50.24,114.608 55.994,114.608 Q2.2
NetQ1_2: Q1.2 Q2.1 R7.1 | length 7.1
  Top Layer w0.635: Q1.2 55.27,113.436 Q2.1 55.296,111.369 R7.1
NetR6_2: R6.2 U1.14 | length 13.7
  Top Layer w0.635: U1.14 37.719,109.22 v1(38.862,108.077) ; v1(47.498,110.871) R6.2
  Bottom Layer w0.762: v1(38.862,108.077) 44.704,108.077 v1(47.498,110.871)
NetR7_2: R7.2 U1.13 | length 26.2
  Top Layer w0.635: U1.13 36.449,108.458 v1(36.703,108.204) ; v1(57.109,109.007) R7.2
  Bottom Layer w0.762: v1(36.703,108.204) 38.862,106.045 54.148,106.045 54.356,106.253 54.356,106.317 57.046,109.007 v1(57.109,109.007)
RST: IC1.3 Q2.3 R2.1 S2.1 | length 20.3
  Top Layer w0.635: R2.1 46.685,115.697 v1(47.117,115.697) ; v1(53.467,115.824) 53.554,115.911 Q2.3 56.246,119.36 S2.1 58.499,121.743 IC1.3
  Bottom Layer w0.762: v1(47.117,115.697) 53.34,115.697 v1(53.467,115.824)
RX0: IC1.34 U1.2 | length 47
  Top Layer w0.635: v1(37.973,112.776) 38.989,113.792 U1.2 ; v1(66.675,112.707) 71.247,112.707 71.628,113.088 71.628,115.062 75.769,119.203 IC1.34
  Bottom Layer w0.762: v1(37.973,112.776) 38.042,112.707 v1(66.675,112.707)
TX0: IC1.35 U1.3 | length 44.5
  Top Layer w0.635: U1.3 v1(37.719,116.84) ; v1(65.659,122.047) 74.295,122.047 75.869,120.473 IC1.35
  Bottom Layer w0.762: v1(37.719,116.84) 40.386,119.507 63.119,119.507 v1(65.659,122.047)
VBAT: C6.2 C11.2 IC3.5 J2.1 J3.1 R13.2 | length 46.4
  Top Layer w0.635: J3.1 33.274,86.741 33.274,92.359 J2.1 34.29,96.408 C6.2 36.068,98.186 36.068,99.568 36.786,100.286 IC3.5 ; C11.2 48.006,82.296 v1(49.403,80.899) 50.8,82.296 R13.2
  Bottom Layer w0.762: J3.1 30.48,83.947 30.48,82.296 31.877,80.899 v1(49.403,80.899)
VCCB: C8.1 IC2.1 J2.2 R8.2 R14.1 | length 30.6
  Top Layer w0.635: J2.2 36.479,93.375 v1(37.084,93.98) ; v1(37.338,89.281) 37.973,89.281 38.928,90.236 IC2.1 ; v1(42.418,91.694) 43.243,92.519 R8.2 44.285,92.367 46.419,90.233 C8.1 49.378,88.709 53.975,88.709 R14.1
  Bottom Layer w0.762: v1(37.084,93.98) 37.084,89.408 37.211,89.281 v1(37.338,89.281) 40.005,89.281 v1(42.418,91.694)
pads on no net: IC1.5 IC1.6 IC1.7 IC1.8 IC1.9 IC1.10 IC1.11 IC1.12 IC1.13 IC1.14 IC1.16 IC1.17 IC1.18 IC1.19 IC1.20 IC1.21 IC1.22 IC1.24 IC1.26 IC1.27 IC1.29 IC1.30 IC1.32 IC1.36 IC1.37 IC2.4 IC4.4 J1.4 J5.7 U1.7 U1.8 U1.9 U1.10 U1.11 U1.12 U1.15
copper on no net:
  other v2: 99.949,82.931

## Polygon pours and split planes (outlines as drawn)
GND on Bottom Layer (solid, pour order 8): 28.321,127.762 103.378,127.762 103.378,79.502 28.321,79.502
no net on Bottom Layer (solid, pour order 2): 28.321,127.762
GND on Top Layer (solid, pour order 6): 28.321,127.762 103.378,127.762 103.378,79.502 28.321,79.502
no net on Top Layer (solid, pour order 4): 28.321,127.762
no net on Mechanical 1 (solid): 28.194,127.635

## Keep-outs
Keep-Out Layer:
  the board outline again, w0.2

## Silkscreen, mask and mechanical layers (free items; w line width, h text height)
Top Overlay:
  drawing of 697 lines, arcs and shapes, not listed
  text "LDH3755" at 68.453,92.329 h3.81
Bottom Overlay:
  text "20213755" at 57.531,118.872 h1.52

## Text inside footprints (layer, text, board x,y; h text height)
IC1: Mechanical 13 "ANTENNA" at 63.481,128.023 h1.78